# Altium PCB Main.PcbDoc (part 1 of 4)
Units mm, origin at the board's own origin, x right, y up, seen from the top; angles counter-clockwise.
Board outline 180 x 80 mm, 4 copper layers (L1_TOP, L2_GND, L3_PWR, L4_BOT), stack 1.447 mm thick; 236 components, 173 nets, 792 pads, 473 vias.
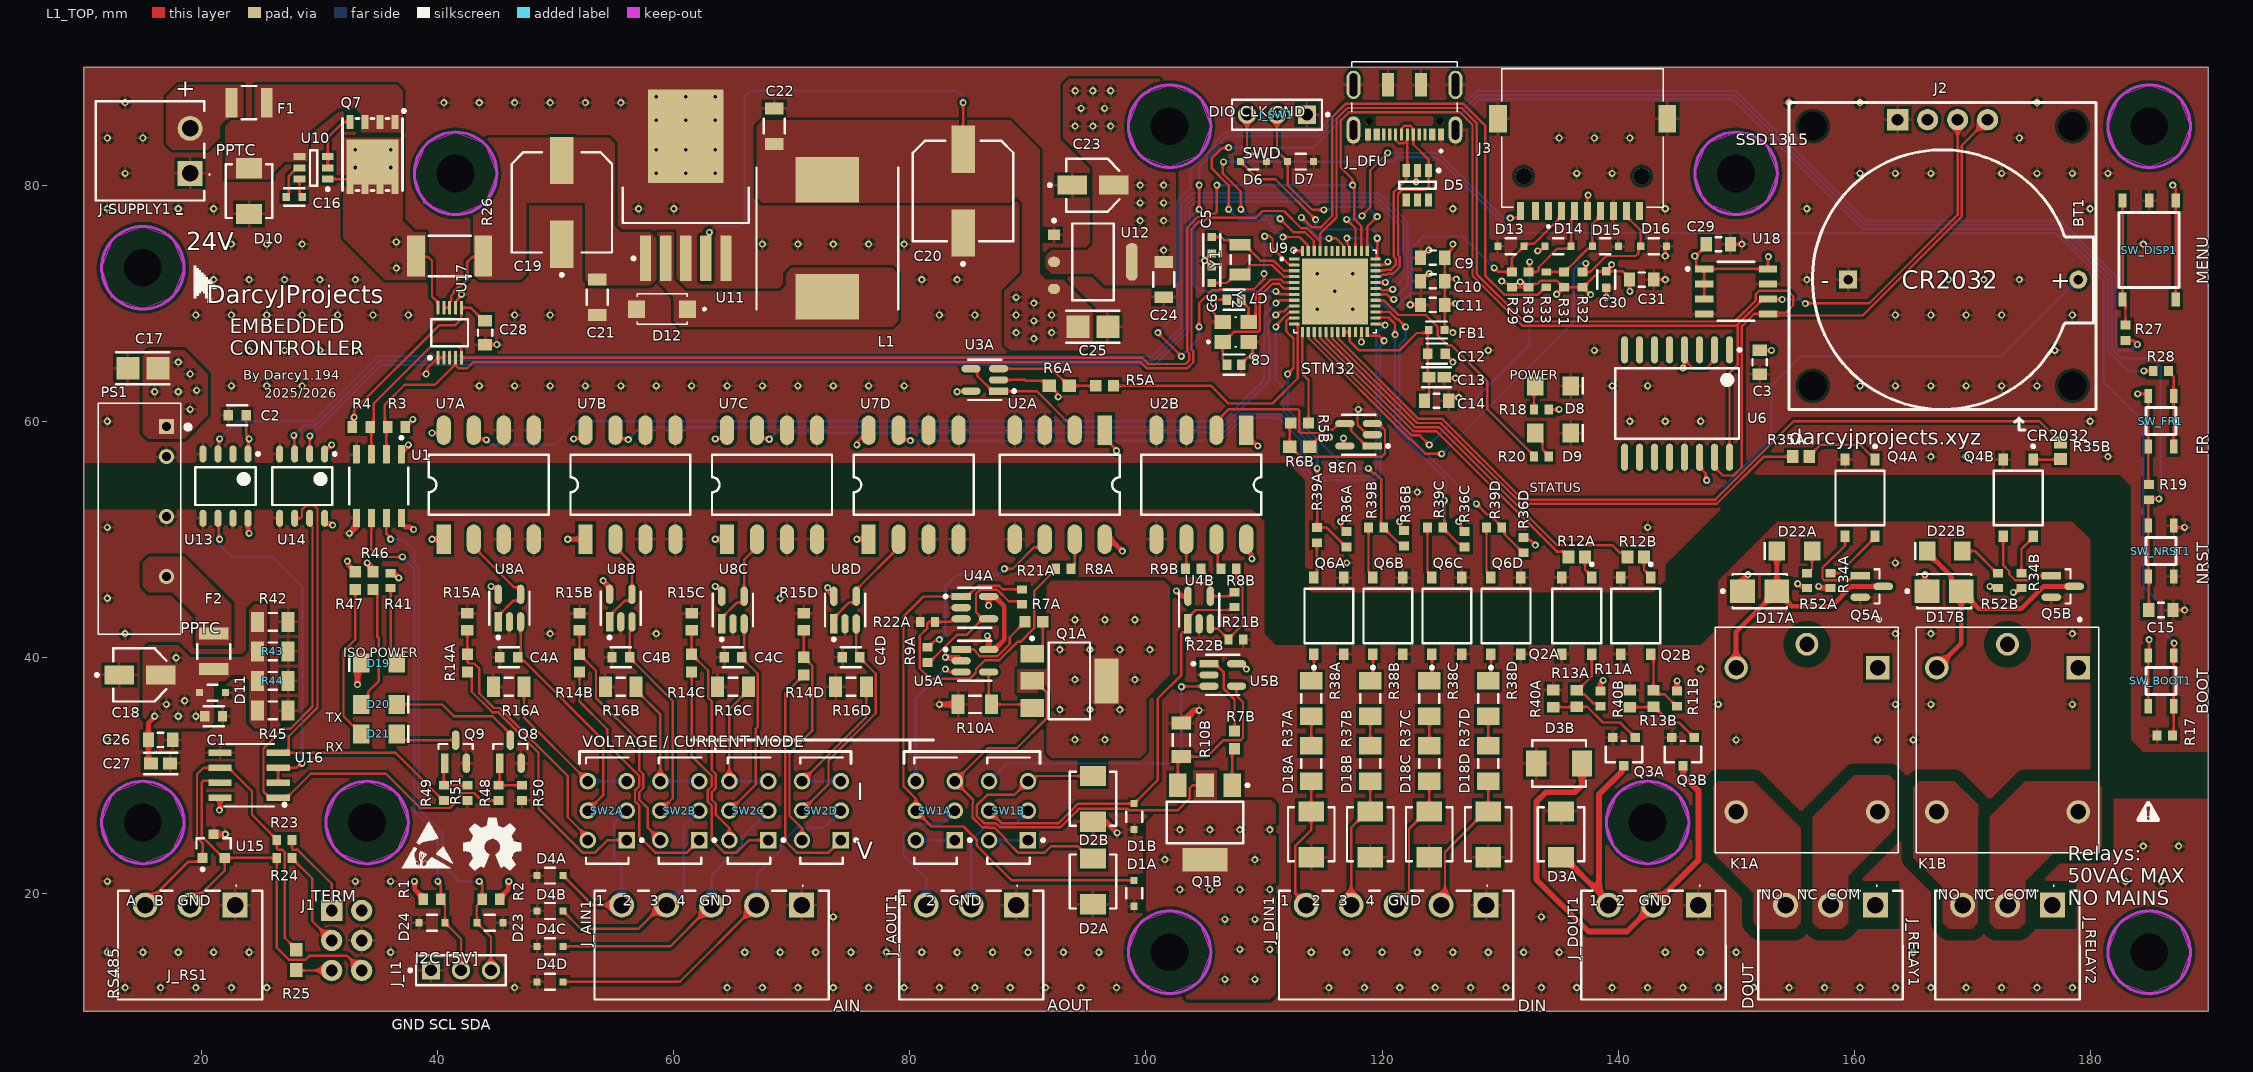
[diagram p0: L1_TOP view]
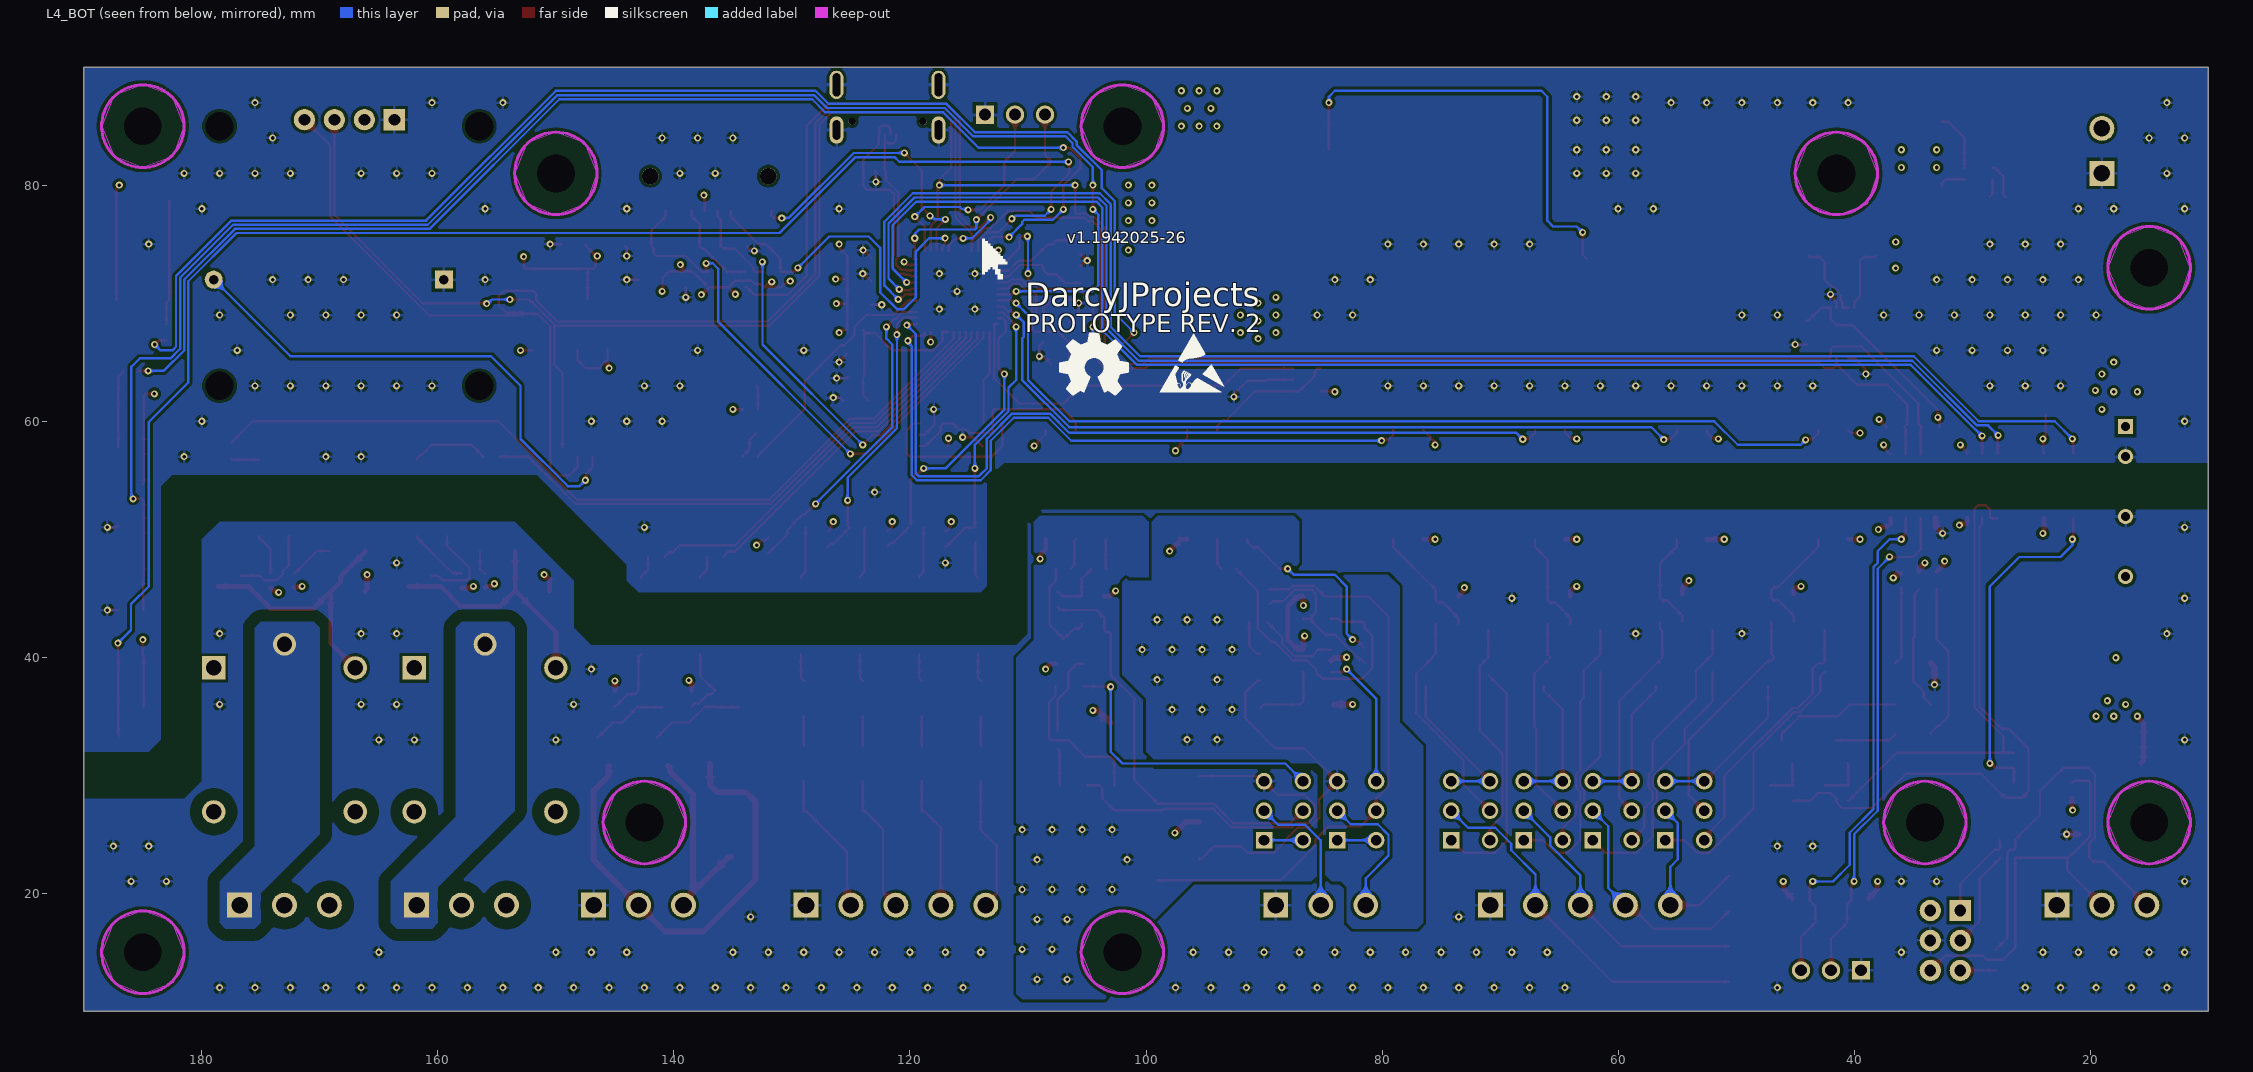
[diagram p1: L4_BOT view, seen from below]
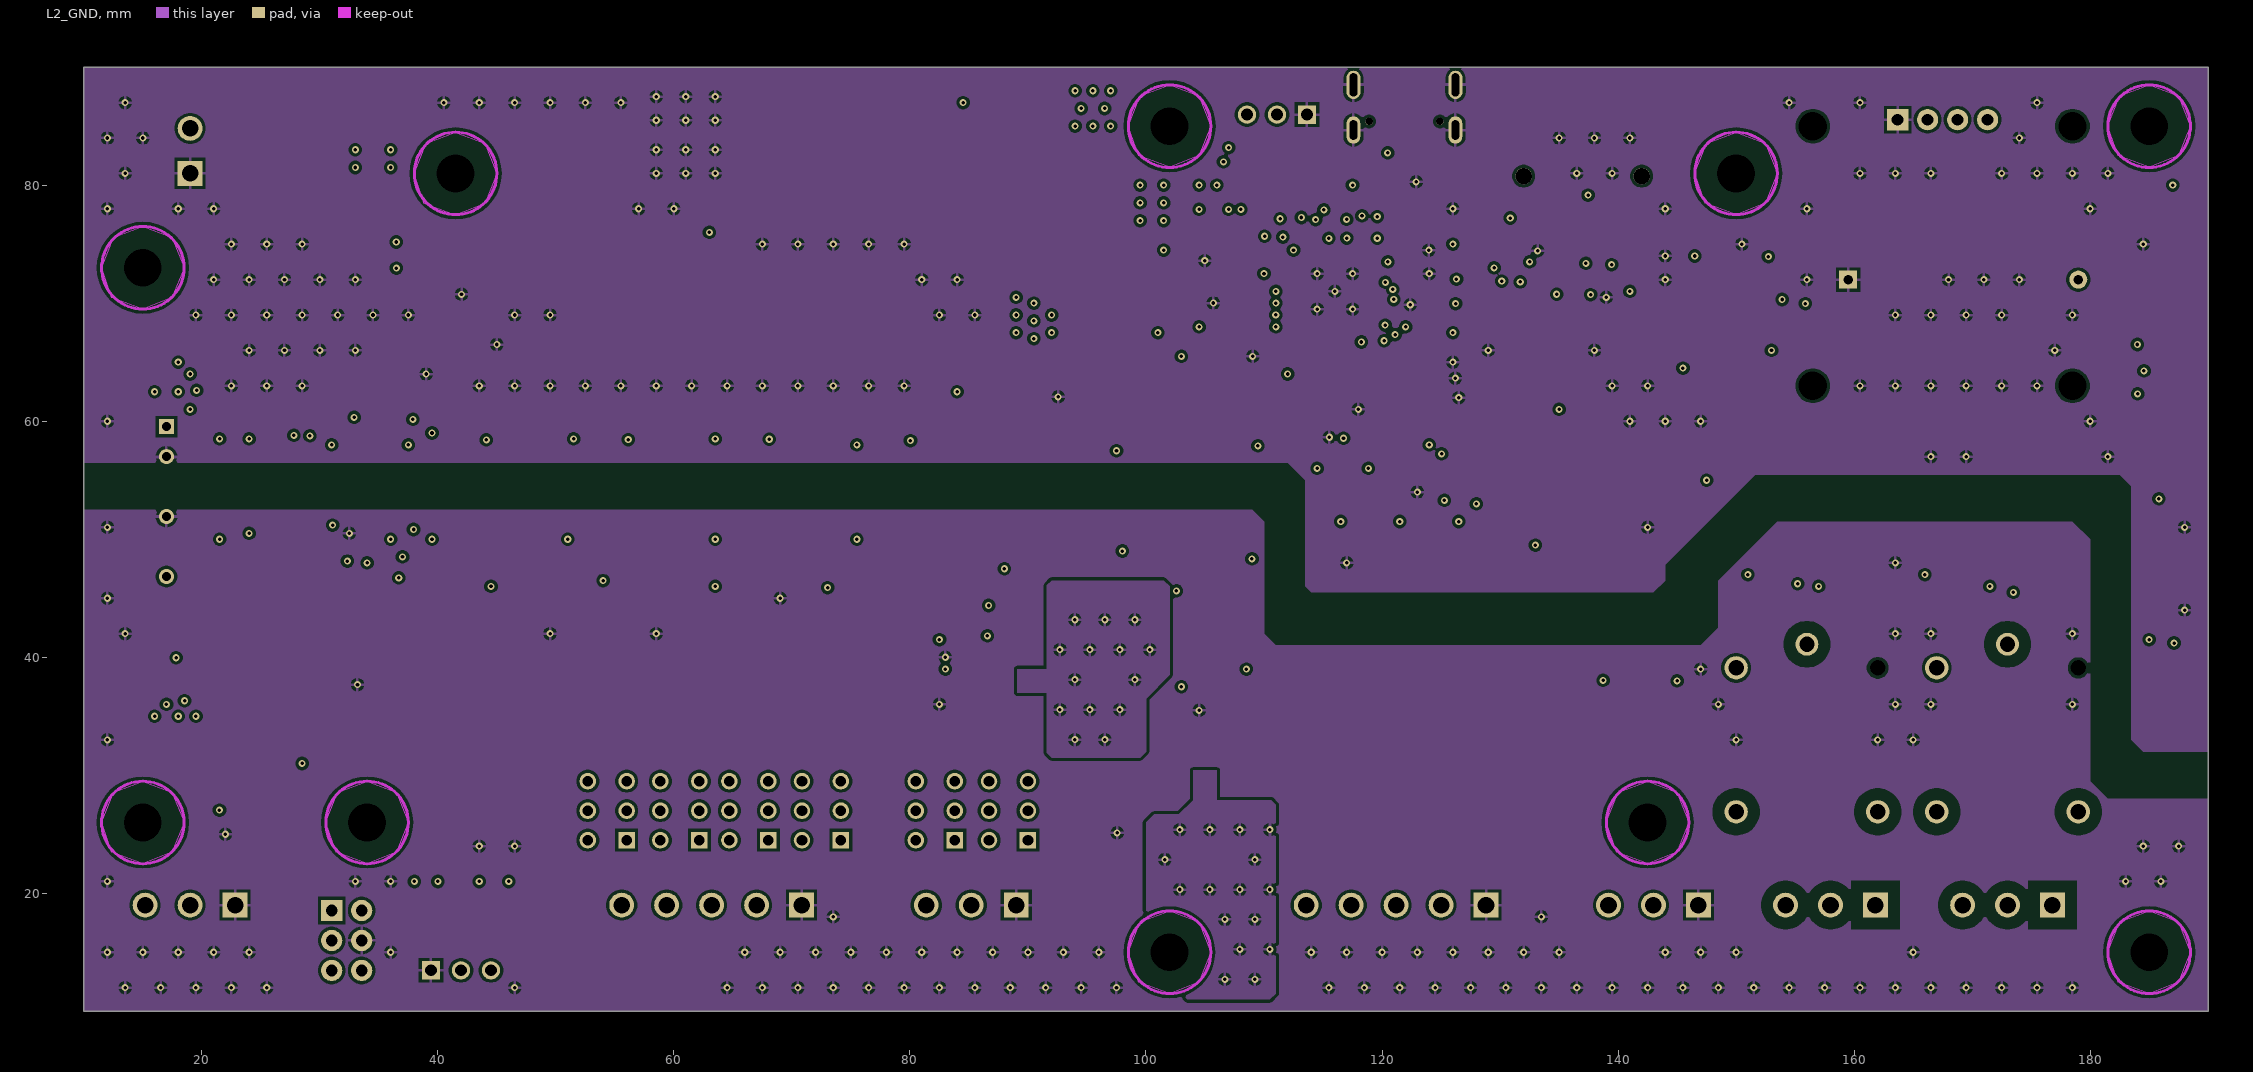
[diagram p2: L2_GND]
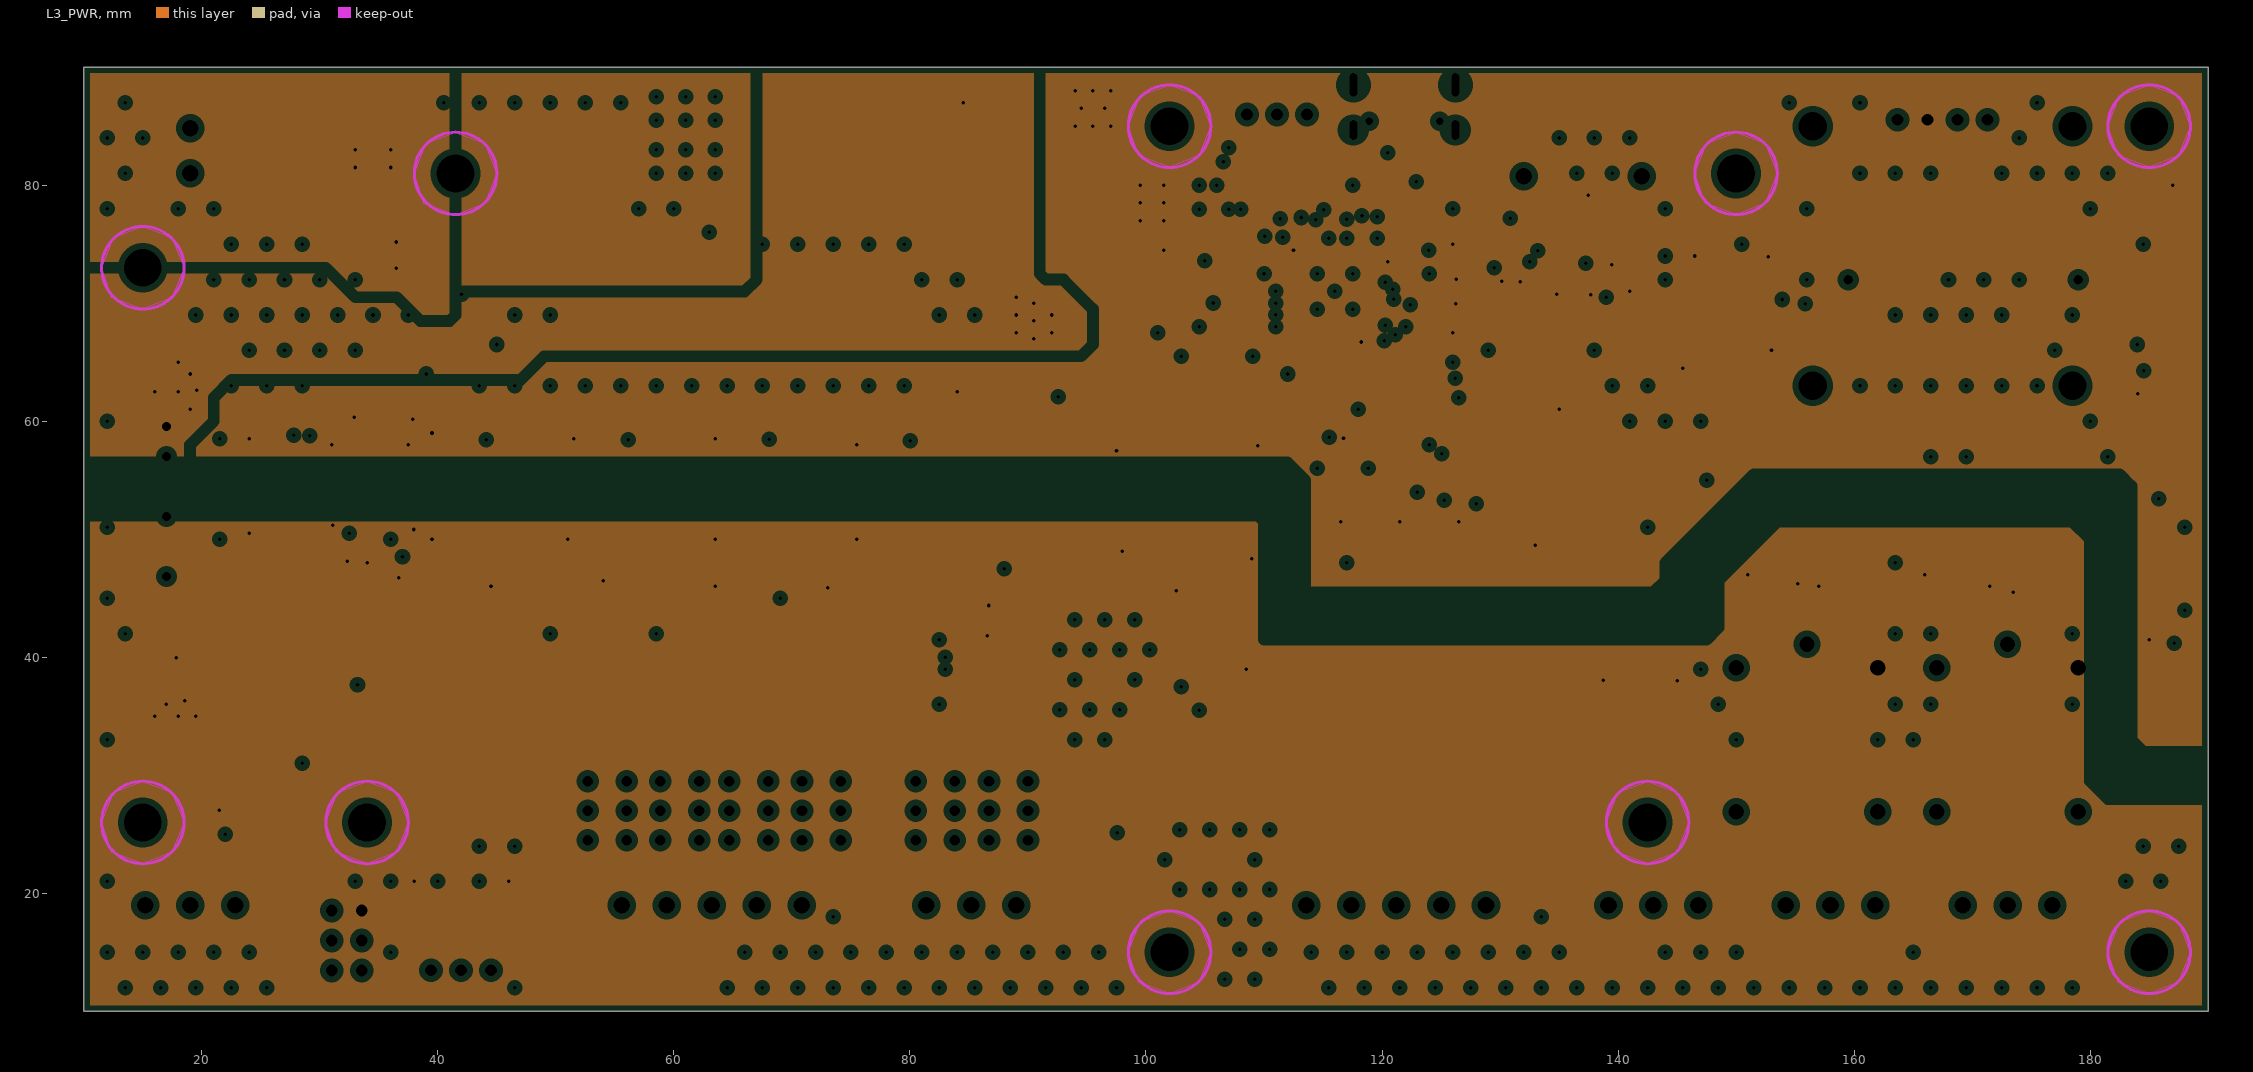
[diagram p3: L3_PWR, clearances drawn from the general rule]
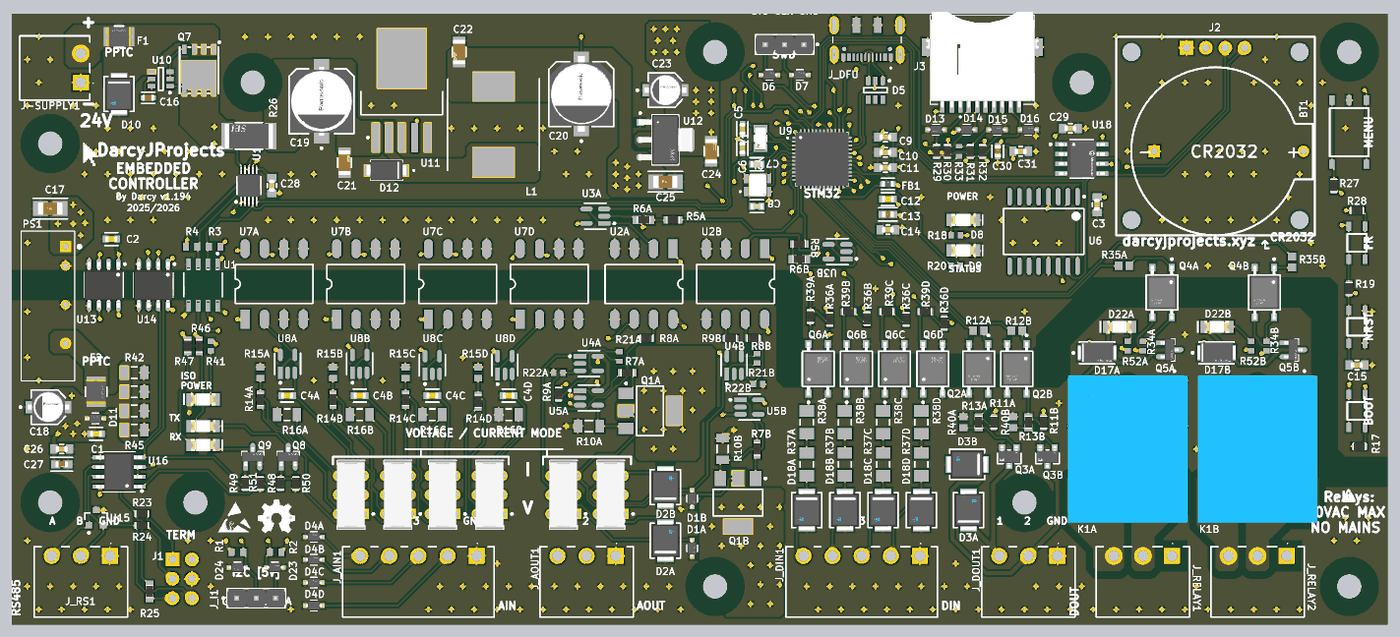
[diagram p6: 3D render of the assembled board from above, using the file's embedded part models]

## Layer stack, top to bottom
Top Solder: solder mask 0.0102, Solder Resist, Dk 3.5
L1_TOP: signal copper 0.035
Dielectric 1: prepreg 0.0711, 7628*1, Dk 4.1
L2_GND: signal copper 0.0152
Dielectric 2: core 1.065, FR-4, Dk 4.1
L3_PWR: plane copper 0.0152, net (Multiple Nets)
Dielectric 3: prepreg 0.2104, 7628*1, Dk 4.1
L4_BOT: signal copper 0.035
Bottom Solder: solder mask 0.0102, Solder Resist, Dk 3.5

## Board outline
10,10 10,90 190,90 190,10

## Design rules (kind name [scope] priority, off if disabled: settings)
Clearance Clearance_Teardrops [IsTeardrop] p1: gap=0.1 ignorepadtopadclearanceinfootprint=FALSE
Clearance Clearance_RelaysEachother [InNetClass('RELAY') vs InNetClass('RELAY')] p2: gap=1 ignorepadtopadclearanceinfootprint=FALSE
Clearance Clearance_RelaysAny [InNetClass('RELAY')] p3: gap=1 ignorepadtopadclearanceinfootprint=FALSE
Clearance Clearance_IsolatedGNDs [InNet('GND') vs InNet('5V_ISO_GND')] p4: gap=1 ignorepadtopadclearanceinfootprint=FALSE
Clearance [All] p5: gap=0.254 ignorepadtopadclearanceinfootprint=FALSE except(0.15: Arc-Arc Arc-Track Arc-SMDPad Track-Track Track-SMDPad SMDPad-SMDPad)
PlaneClearance [All] p1: clearance=0.508
PlaneConnect [All] p1: planeconnectstyle=Relief reliefexpansion=0.508 reliefentries=4 reliefconductorwidth=0.254 reliefairgap=0.254
PolygonConnect PolygonConnect_24V_Power_Direct [InNet('24V')] p1: thpad.connectstyle=Direct thpad.reliefconductorwidth=0.254 thpad.reliefentries=4 thpad.polygonreliefangle="90 Angle" thpad.airgapwidth=0.254 smdpad.connectstyle=Direct smdpad.reliefconductorwidth=0.254 smdpad.reliefentries=4 smdpad.polygonreliefangle="90 Angle" smdpad.airgapwidth=0.254 via.connectstyle=Relief via.reliefconductorwidth=0.254 via.reliefentries=4 via.polygonreliefangle="90 Angle" via.airgapwidth=0.254
PolygonConnect PolygonConnect_24V_PREMEASURE_Power_Direct [InNet('24V_PREMEASURE')] p2: thpad.connectstyle=Direct thpad.reliefconductorwidth=0.254 thpad.reliefentries=4 thpad.polygonreliefangle="90 Angle" thpad.airgapwidth=0.254 smdpad.connectstyle=Direct smdpad.reliefconductorwidth=0.254 smdpad.reliefentries=4 smdpad.polygonreliefangle="90 Angle" smdpad.airgapwidth=0.254 via.connectstyle=Relief via.reliefconductorwidth=0.254 via.reliefentries=4 via.polygonreliefangle="90 Angle" via.airgapwidth=0.254
PolygonConnect PolygonConnect_NETD12_1_Power_Direct_1 [InNet('NetD12_1')] p3: thpad.connectstyle=Direct thpad.reliefconductorwidth=0.254 thpad.reliefentries=4 thpad.polygonreliefangle="90 Angle" thpad.airgapwidth=0.254 smdpad.connectstyle=Direct smdpad.reliefconductorwidth=0.254 smdpad.reliefentries=4 smdpad.polygonreliefangle="90 Angle" smdpad.airgapwidth=0.254 via.connectstyle=Relief via.reliefconductorwidth=0.254 via.reliefentries=4 via.polygonreliefangle="90 Angle" via.airgapwidth=0.254
PolygonConnect PolygonConnect_24V_NetD10_1_Power_Direct [InNet('NetD10_1')] p4: thpad.connectstyle=Direct thpad.reliefconductorwidth=0.254 thpad.reliefentries=4 thpad.polygonreliefangle="90 Angle" thpad.airgapwidth=0.254 smdpad.connectstyle=Direct smdpad.reliefconductorwidth=0.254 smdpad.reliefentries=4 smdpad.polygonreliefangle="90 Angle" smdpad.airgapwidth=0.254 via.connectstyle=Relief via.reliefconductorwidth=0.254 via.reliefentries=4 via.polygonreliefangle="90 Angle" via.airgapwidth=0.254
PolygonConnect PolygonConnect_Relay [InNetClass('RELAY')] p5: thpad.connectstyle=Direct thpad.reliefconductorwidth=0.254 thpad.reliefentries=4 thpad.polygonreliefangle="90 Angle" thpad.airgapwidth=0.254 smdpad.connectstyle=Relief smdpad.reliefconductorwidth=0.254 smdpad.reliefentries=4 smdpad.polygonreliefangle="90 Angle" smdpad.airgapwidth=0.254 via.connectstyle=Relief via.reliefconductorwidth=0.254 via.reliefentries=4 via.polygonreliefangle="90 Angle" via.airgapwidth=0.254
PolygonConnect [All] p6: connectstyle=Relief reliefconductorwidth=0.254 reliefentries=4 polygonreliefangle="90 Angle" airgapwidth=0.254
RoutingVias [All] p1: holewidth=0.3 width=0.6 viastyle="Through Hole" minholewidth=0.3 minwidth=0.6 maxholewidth=0.4 maxwidth=0.7
SolderMaskExpansion [All] p1: expansion=0.102 istentingtop=FALSE
SupplyNets "Schematic Supply Nets_10" [InNet('5V_ISO')] p1: voltage=0.000
SupplyNets "Schematic Supply Nets_9" [InNet('5V_ISO_GND')] p2: voltage=0.000
SupplyNets "Schematic Supply Nets_8" [InNet('24V')] p3: voltage=0.000
SupplyNets "Schematic Supply Nets_7" [InNet('5V')] p4: voltage=0.000
SupplyNets "Schematic Supply Nets_6" [InNet('GND')] p5: voltage=0.000
SupplyNets "Schematic Supply Nets_5" [InNet('3V3')] p6: voltage=0.000
SupplyNets "Schematic Supply Nets_3" [InNet('24V_PREMEASURE')] p7: voltage=0.000
SupplyNets "Schematic Supply Nets" [InNet('VREF+')] p8: voltage=0.000
Width Width_DOUT_SINKING [InNetClass('DOUT_SINKING')] p1: maxlimit=0.5 minlimit=0.5 preferedwidth=0.5
Width Width_RELAY_COIL [InNetClass('RELAY_COIL')] p2: maxlimit=0.4 minlimit=0.4 preferedwidth=0.4
Width [All] p3: maxlimit=0.2 minlimit=0.2 preferedwidth=0.2
28 further rules are at their usual default settings.

## Classes and differential pairs
net class RELAY: NetJ_RELAY1_1 NetJ_RELAY1_2 NetJ_RELAY1_3 NetJ_RELAY2_1 NetJ_RELAY2_2 NetJ_RELAY2_3
net class DOUT_SINKING: 5V_ISO_GND DOUT1_FIELD DOUT2_FIELD
net class RELAY_COIL: 5V_ISO 5V_ISO_GND NetD17A_2 NetD17B_2
channel class DOut_Isolator: U_DOUT1 U_DOUT2
channel class DIn_Isolator: U_DIN1 U_DIN2 U_DIN3 U_DIN4
component class U_SPI_SD: C30 C31 D13 D14 D15 D16 J3 R29 R30 R31 R32 R33
component class U_DOUT2: D3B Q2 Q2B Q3 Q3B R11 R11B R12 R12B R13B R40B
component class U_DOUT1: D3A Q2 Q2A Q3 Q3A R11 R11A R12 R12A R13A R40A
component class U_DIN4: D18D Q6 Q6D R36D R37D R38 R38D R39 R39D
component class U_DIN3: D18C Q6 Q6C R36C R37C R38 R38C R39 R39C
component class U_DIN2: D18B Q6 Q6B R36B R37B R38 R38B R39 R39B
component class U_DIN1: D18A Q6 Q6A R36A R37A R38 R38A R39 R39A
component class U_RELAY2: D17B D22B K1 K1B Q4 Q4B Q5 Q5B R34B R35B R52B
component class U_RELAY1: D17A D22A K1 K1A Q4 Q4A Q5 Q5A R34A R35A R52A
component class U_AOUT2: D1B D2B Q1 Q1B R5 R5B R6 R6B R7 R7B R8 R8B R9 R9B R10 R10B R21B R22B SW1 SW1B U2 U2B U3 U3B U4B U5 U5B
component class U_AOUT1: D1A D2A Q1 Q1A R5 R5A R6 R6A R7 R7A R8 R8A R9 R9A R10 R10A R21A R22A SW1 SW1A U2 U2A U3 U3A U4A U5 U5A
channel class DOut_Relay: U_RELAY1 U_RELAY2
channel class AOut_Isolator: U_AOUT1 U_AOUT2
channel class AIn_Isolator: U_AIN1 U_AIN2 U_AIN3 U_AIN4
component class U_STM32_MCU: C5 C6 C7 C8 C9 C10 C11 C12 C13 C14 C15 D5 D6 D7 D8 D9 FB1 J_DFU J_SW1 R17 R18 R19 R20 SW_BOOT1 SW_NRST1 U9 Y1 Y2
component class U_RS485: C26 C27 D20 D21 J1 Q8 Q9 R23 R24 R25 R46 R47 R48 R49 R50 R51 U13 U14 U15 U16
component class U_Power_Supply: C16 C17 C18 C19 C20 C21 C22 C23 C24 C25 D10 D11 D12 D19 F1 F2 L1 PS1 Q7 R41 R42 R43 R44 R45 U10 U11 U12
component class U_I2C_RTC_DS3231: BT1 C3 U6
component class U_I2C_PowerMonitor_INA226: C28 R26 U17
component class U_I2C_Isolator: C1 C2 D23 D24 J_I1 R1 R2 R3 R4 U1
component class U_I2C_EEPROM_AT24C32: C29 U18
component class U_I2C_Display: J2 R27 SW_DISP1
component class U_BTN2_FactoryReset: R28 SW_FR1
component class U_AIN4: C4D D4D R14D R15D R16D SW2 SW2D U7 U7D U8D
component class U_AIN3: C4C D4C R14C R15C R16C SW2 SW2C U7 U7C U8C
component class U_AIN2: C4B D4B R14B R15B R16B SW2 SW2B U7 U7B U8B
component class U_AIN1: C4A D4A R14A R15A R16A SW2 SW2A U7 U7A U8A
component class Main: J-SUPPLY1 J_AIN1 J_AOUT1 J_DIN1 J_DOUT1 J_RELAY1 J_RELAY2 J_RS1

## Components (designator, comment, footprint, x,y, rotation, side; value= is the part's Value field where it differs from the comment)
BT1 "CR2032_HOLDER_TH" CR2032_HOLDER_TH 169.246,72 r0 top
C1 "103" FP-CC0603-DA-MFG 21,35 r0 top value="100 nF"
C2 "103" FP-CC0603-DA-MFG 23,60.5 r180 top value="100 nF"
C3 "100nF" FP-CGA3E-0_3-0_1-IPC_A 152,65 r90 top
C4A "10nF" FP-CC0603-DA-MFG 46,40 r180 top value="10 nF" (schematic designator C4)
C4B "10nF" FP-CC0603-DA-MFG 55.5,40 r180 top value="10 nF" (schematic designator C4)
C4C "10nF" FP-CC0603-DA-MFG 65,40 r180 top value="10 nF" (schematic designator C4)
C4D "10nF" FP-CC0603-DA-MFG 75,40 r180 top value="10 nF" (schematic designator C4)
C5 "6pF" FP-CGA3E-0_3-0_1-MFG 105.582,74.913 r270 top
C6 "6pF" FP-CGA3E-0_3-0_1-MFG 105.582,72.413 r90 top
C7 "10pF" FP-C0603C-CF-MFG 107.473,70.296 r180 top value="10 pF"
C8 "10pF" FP-C0603C-CF-MFG 107.473,64.796 r180 top value="10 pF"
C9 "100nF" FP-CGA3E-0_3-0_1-IPC_A 124.293,73.857 r180 top
C10 "100nF" FP-CGA3E-0_3-0_1-IPC_A 124.293,71.857 r180 top
C11 "100nF" FP-CGA3E-0_3-0_1-IPC_A 124.293,69.857 r180 top
C12 "10nF" FP-CC0603-DA-MFG 124.623,65.73 r0 top value="10 nF"
C13 "1uF" FP-C1608-080-0_1-IPC_B 124.623,63.73 r0 top
C14 "100nF" FP-CGA3E-0_3-0_1-IPC_A 124.623,61.73 r0 top
C15 "100nF" FP-CGA3E-0_3-0_1-IPC_A 186,44 r180 top
C16 "2.2uF" FP-GRM188-0_1-e0_2_0_5-MFG 27.825,79 r0 top
C17 "10uF" FP-C3216-160-0_2-IPC_A 15,64.5 r180 top
C18 "10uF" FP-FKB-MFG 14.75,38.5 r0 top
C19 "100uF" FP-FKF-MFG 50.5,78.55 r90 top
C20 "220uF" FP-FPF-MFG 84.5,79.5 r90 top
C21 "100nF" FP-1206-L_3_2_0_2-W_1_6_0-MFG 53.5,70.5 r90 top
C22 "100nF" FP-1206-L_3_2_0_2-W_1_6_0-MFG 68.5,85 r270 top
C23 "10uF" FP-FKB-MFG 95.5,80 r0 top
C24 "100nF" FP-1206-L_3_2_0_2-W_1_6_0-MFG 101.5,72 r90 top
C25 "10uF" FP-C3216-160-0_2-IPC_A 95.5,68 r0 top
C26 "100nF" FP-CGA3E-0_3-0_1-IPC_A 16.5,33 r180 top
C27 "10uF" FP-GRM188-0_1-e0_2_0_55-IPC_A 16.5,31 r0 top
C28 "100nF" FP-CGA3E-0_3-0_1-IPC_A 44,67.5 r90 top
C29 "100nF" FP-CGA3E-0_3-0_1-IPC_A 148.5,75 r180 top
C30 "10uF" FP-C1608-080-0_1-MFG 139,72 r90 top
C31 "100nF" FP-CGA3E-0_3-0_1-IPC_A 142,72 r0 top
D1A "PESD5V0S1BA,115" FP-SOD323-CA-MFG 99,20 r270 top (schematic designator D1)
D1B "PESD5V0S1BA,115" FP-SOD323-CA-MFG 99,26.5 r270 top (schematic designator D1)
D2A "SMBJ30CA" FP-SMBJ30CAHE3-52-MFG 95.5,21 r90 top (schematic designator D2)
D2B "SMBJ30CA" FP-SMBJ30CAHE3-52-MFG 95.5,28 r90 top (schematic designator D2)
D3A "SMBJ30CA" FP-SMBJ30CAHE3-52-MFG 135.165,25 r90 top (schematic designator D3)
D3B "SMBJ30CA" FP-SMBJ30CAHE3-52-MFG 135,31 r180 top (schematic designator D3)
D4A "PESD5V0S1BA,115" FP-SOD323-CA-MFG 49.5,21.5 r0 top (schematic designator D4)
D4B "PESD5V0S1BA,115" FP-SOD323-CA-MFG 49.5,18.5 r0 top (schematic designator D4)
D4C "PESD5V0S1BA,115" FP-SOD323-CA-MFG 49.5,15.5 r0 top (schematic designator D4)
D4D "PESD5V0S1BA,115" FP-SOD323-CA-MFG 49.5,12.5 r0 top (schematic designator D4)
D5 "SRV05-4.TCT" SMTC-SOT23-6_V 123,80 r270 top
D6 "PESD5V0S1BA,115" FP-SOD323-CA-MFG 109.1,82 r0 top
D7 "PESD5V0S1BA,115" FP-SOD323-CA-MFG 113.1,82 r0 top
D8 "Green 1206" WL-SMCW_1206_150120xx75000 134.5,63 r180 top
D9 "Red 1206" WL-SMCW_1206_150120xx75000 134.5,59 r180 top
D10 "SMBJ30CA" FP-SMBJ30CAHE3-52-MFG 24,79.5 r270 top
D11 "PESD5V0S1BA,115" FP-SOD323-CA-MFG 20.9,37 r0 top
D12 "SS36ALH" SODFL5226X100N 59,69.5 r180 top
D13 "PESD5V0S1BA,115" FP-SOD323-CA-MFG 130.92,74.825 r180 top
D14 "PESD5V0S1BA,115" FP-SOD323-CA-MFG 134.92,74.825 r180 top
D15 "PESD5V0S1BA,115" FP-SOD323-CA-MFG 138.92,74.825 r0 top
D16 "PESD5V0S1BA,115" FP-SOD323-CA-MFG 143.02,74.825 r0 top
D17A "1N4007" FP-1N4007_SMD-IPC_C 152,45.6 r0 top (schematic designator D17)
D17B "1N4007" FP-1N4007_SMD-IPC_C 167.632,45.6 r0 top (schematic designator D17)
D18A "SMBJ30CA" FP-SMBJ30CAHE3-52-MFG 114,25 r270 top (schematic designator D18)
D18B "SMBJ30CA" FP-SMBJ30CAHE3-52-MFG 119,25 r270 top (schematic designator D18)
D18C "SMBJ30CA" FP-SMBJ30CAHE3-52-MFG 124,25 r270 top (schematic designator D18)
D18D "SMBJ30CA" FP-SMBJ30CAHE3-52-MFG 129,25 r270 top (schematic designator D18)
D19 "Green 1206" WL-SMCW_1206_150120xx75000 35,39.5 r0 top
D20 "Blue 1206" WL-SMCW_1206_150120xx75000 35,36 r180 top
D21 "Blue 1206" WL-SMCW_1206_150120xx75000 35,33.5 r180 top
D22A "Yellow 1206" WL-SMCW_1206_150120xx75000 154.938,49 r0 top (schematic designator D22)
D22B "Yellow 1206" WL-SMCW_1206_150120xx75000 167.682,49 r0 top (schematic designator D22)
D23 "PESD5V0S1BA,115" FP-SOD323-CA-MFG 44.4,17.5 r0 top
D24 "PESD5V0S1BA,115" FP-SOD323-CA-MFG 39.5,17.5 r180 top
F1 "30V 2A" FP-MF-USMF-MFG 24,87 r0 top value=0.4-5Ω
F2 "6V 0.75A" FP-MF-USMF-MFG 21,40.5 r270 top value=0.4-5Ω
FB1 "1K 100MHz 0603" FP-BLM18-0_15-t0_8-MFG 124.623,67.73 r180 top
J1 "Jumper_2x6_2.54" Jumper_2x6_2.54 29.73,19.81 r270 top
J2 "OLED_096_SSD1315" OLED_096_SSD1315 167.5,74 r0 top
J3 "MSD-11-A" CUI_MSD-11-A 137,84 r180 top
J-SUPPLY1 "15EDGRC-3.81-02P" 15EDGRC-3.81-02P 19,81 r90 top
J_AIN1 "5Pin" 15EDGRC-3.81-05P 70.81,19 r180 top
J_AOUT1 "3Pin" 15EDGRC-3.81-03P 89,19 r180 top
J_DFU "USBC" JAE_DX07S016JA1R1500 121.9,85.4 r180 top
J_DIN1 "5Pin" 15EDGRC-3.81-05P 128.81,19 r180 top
J_DOUT1 "3Pin" 15EDGRC-3.81-03P 146.81,19 r180 top
J_I1 "90120-0123" FP-90120-0123-MFG 41.953,13.47 r0 top
J_RELAY1 "3Pin" 15EDGRC-3.81-03P 161.81,19 r180 top
J_RELAY2 "3Pin" 15EDGRC-3.81-03P 176.81,19 r180 top
J_RS1 "3Pin" 15EDGRC-3.81-03P 22.81,19 r180 top
J_SW1 "90120-0123" FP-90120-0123-MFG 111.1,85.979 r180 top
K1A "SRD-05VDC-SL-C" RELAY_SRD-05VDC-SL-C 156,33 r270 top (schematic designator K1)
K1B "SRD-05VDC-SL-C" RELAY_SRD-05VDC-SL-C 173,33 r270 top (schematic designator K1)
L1 "47uH" INDPM120120X800N 73,75.5 r90 top
PS1 "B0505S-2W" B0505S-2W 11.2,61.54 r270 top
Q1A "BCP56" ONSC-SOT-223-4-318E-04_V 93.5,38 r0 top (schematic designator Q1)
Q1B "BCP56" ONSC-SOT-223-4-318E-04_V 105,26 r270 top (schematic designator Q1)
Q2A "LTV-356T-D" FP-LTV-356T-D-MFG 136.5,43.5 r270 top (schematic designator Q2)
Q2B "LTV-356T-D" FP-LTV-356T-D-MFG 141.5,43.5 r270 top (schematic designator Q2)
Q3A "AO3400A" FP-SOT23-MFG 140.5,32 r270 top (schematic designator Q3)
Q3B "AO3400A" FP-SOT23-MFG 145.5,32 r270 top (schematic designator Q3)
Q4A "LTV-356T-D" FP-LTV-356T-D-MFG 160.5,53.5 r270 top (schematic designator Q4)
Q4B "LTV-356T-D" FP-LTV-356T-D-MFG 173.9,53.5 r270 top (schematic designator Q4)
Q5A "MMBT2222A-7-F" FP-SOT23-IPC_A 161.5,46 r0 top (schematic designator Q5)
Q5B "MMBT2222A-7-F" FP-SOT23-IPC_A 177.682,46 r0 top (schematic designator Q5)
Q6A "LTV-356T-D" FP-LTV-356T-D-MFG 115.5,43.5 r90 top (schematic designator Q6)
Q6B "LTV-356T-D" FP-LTV-356T-D-MFG 120.5,43.5 r90 top (schematic designator Q6)
Q6C "LTV-356T-D" FP-LTV-356T-D-MFG 125.5,43.5 r90 top (schematic designator Q6)
Q6D "LTV-356T-D" FP-LTV-356T-D-MFG 130.5,43.5 r90 top (schematic designator Q6)
Q7 "AGM403A1-M1" DFN8_5X6MM 37.134,86.285 r180 top
Q8 "MMBT2222A-7-F" FP-SOT23-IPC_A 46.14,32 r90 top
Q9 "MMBT2222A-7-F" FP-SOT23-IPC_A 41.5,32 r90 top
R1 "4.7K" RESC1608X55X25ML10T15 39.5,19.5 r180 top
R2 "4.7K" RESC1608X55X25ML10T15 44.5,19.5 r0 top
R3 "4.7K" RESC1608X55X25ML10T15 36.5,59.5 r0 top
R4 "4.7K" RESC1608X55X25ML10T15 33.5,59.5 r180 top
R5A "47K" RESC1608X55X30NL15T15 96.5,63 r180 top (schematic designator R5)
R5B "47K" RESC1608X55X30NL15T15 113.017,59.853 r180 top (schematic designator R5)
R6A "3.3K" RESC1609X55X30ML15T15 92.65,63 r180 top (schematic designator R6)
R6B "3.3K" RESC1609X55X30ML15T15 113.017,57.853 r0 top (schematic designator R6)
R7A "470R" RESC1608X55X30NL15T15 90.5,43 r0 top (schematic designator R7)
R7B "470R" RESC1608X55X30NL15T15 107.5,33 r270 top (schematic designator R7)
R8A "10K" RESC1609X55X30LL15T15 93,47.5 r180 top (schematic designator R8)
R8B "10K" RESC1609X55X30LL15T15 107,47.5 r0 top (schematic designator R8)
R9A "10K" RESC1609X55X30LL15T15 81.5,40.2 r270 top (schematic designator R9)
R9B "10K" RESC1609X55X30LL15T15 104,47.5 r0 top (schematic designator R9)
R10A "100R" RESC3216X70X50NL05T20 85.5,36 r0 top (schematic designator R10)
R10B "100R" RESC3216X70X50NL05T20 103,33 r270 top (schematic designator R10)
R11A "10K" RESC1609X55X30LL15T15 138.5,36.5 r270 top (schematic designator R11)
R11B "10K" RESC1609X55X30LL15T15 145,36.5 r270 top (schematic designator R11)
R12A "150R" RESC1608X55X30ML20T20 136.5,48.5 r0 top (schematic designator R12)
R12B "150R" RESC1608X55X30ML20T20 141.5,48.5 r0 top (schematic designator R12)
R13A "100R" RESC1609X50X30ML8T20 136.5,36.5 r270 top (schematic designator R13)
R13B "100R" RESC1609X50X30ML8T20 143,36.5 r270 top (schematic designator R13)
R14A "47K" RESC1608X55X30NL15T15 42.5,39.5 r90 top (schematic designator R14)
R14B "47K" RESC1608X55X30NL15T15 52,39.5 r90 top (schematic designator R14)
R14C "47K" RESC1608X55X30NL15T15 61.5,39.5 r90 top (schematic designator R14)
R14D "47K" RESC1608X55X30NL15T15 71,39.25 r90 top (schematic designator R14)
R15A "2K" RESC1608X55X30ML15T15 42.5,43 r270 top (schematic designator R15)
R15B "2K" RESC1608X55X30ML15T15 52,43 r270 top (schematic designator R15)
R15C "2K" RESC1608X55X30ML15T15 61.5,43 r270 top (schematic designator R15)
R15D "2K" RESC1608X55X30ML15T15 71,43 r270 top (schematic designator R15)
R16A "10R" RESC3216X70X50LL20T25 46,37.5 r180 top (schematic designator R16)
R16B "10R" RESC3216X70X50LL20T25 55.5,37.5 r180 top (schematic designator R16)
R16C "10R" RESC3216X70X50LL20T25 65,37.5 r180 top (schematic designator R16)
R16D "10R" RESC3216X70X50LL20T25 75,37.5 r180 top (schematic designator R16)
R17 "10K" RESC1609X55X30LL15T15 186.327,33.35 r0 top
R18 "5.1K" RESC1608X55X30LL15T15#1 133.5,61 r180 top
R19 "10K" RESC1609X55X30LL15T15 185,54 r270 top
R20 "5.1K" RESC1608X55X30LL15T15#1 133.5,57 r0 top
R21A "30K" RESC1608X55X30LL15T15#1 89.5,45.125 r270 top (schematic designator R21)
R21B "30K" RESC1608X55X30LL15T15#1 107.5,44.875 r90 top (schematic designator R21)
R22A "30K" RESC1608X55X30LL15T15#1 81.5,43 r180 top (schematic designator R22)
R22B "30K" RESC1608X55X30LL15T15#1 107.625,41.5 r0 top (schematic designator R22)
R23 "10K" RESC1609X55X30LL15T15 27,24.5 r180 top
R24 "10K" RESC1609X55X30LL15T15 27,23 r180 top
R25 "120R" RESC1609X55X30ML15T15 28,14.35 r270 top
R26 "0.1R" FP-RMCF2512-IPC_B 41,74 r180 top
R27 "330R" RESC1608X55X30LL15T15#2 183,67.5 r270 top
R28 "330R" RESC1608X55X30LL15T15#2 186,64.236 r180 top
R29 "10K" RESC1609X55X30LL15T15 131,72 r90 top
R30 "10K" RESC1609X55X30LL15T15 132.42,72 r90 top
R31 "10K" RESC1609X55X30LL15T15 135.43,72 r90 top
R32 "10K" RESC1609X55X30LL15T15 137,72 r90 top
R33 "33R" RESC1608X55X25LL10T15 133.93,72 r90 top
R34A "2.2K" RESC1608X55X30LL15T15#1 158,46.5 r90 top (schematic designator R34)
R34B "2.2K" RESC1608X55X30LL15T15#1 174.182,46.5 r90 top (schematic designator R34)
R35A "150R" RESC1608X55X30ML20T20 155.5,57 r0 top (schematic designator R35)
R35B "150R" RESC1608X55X30ML20T20 177.5,57.5 r270 top (schematic designator R35)
R36A "10K" RESC1609X55X30LL15T15 117,50 r270 top (schematic designator R36)
R36B "10K" RESC1609X55X30LL15T15 121.873,50.077 r270 top (schematic designator R36)
R36C "10K" RESC1609X55X30LL15T15 127,50 r270 top (schematic designator R36)
R36D "10K" RESC1609X55X30LL15T15 132,49.5 r270 top (schematic designator R36)
R37A "1K" RESC3216X70X50ML20T25 114,31 r90 top (schematic designator R37)
R37B "1K" RESC3216X70X50ML20T25 119,31 r90 top (schematic designator R37)
R37C "1K" RESC3216X70X50ML20T25 124,31 r90 top (schematic designator R37)
R37D "1K" RESC3216X70X50ML20T25 129,31 r90 top (schematic designator R37)
R38A "1K" RESC3216X70X50ML20T25 114,36.5 r90 top (schematic designator R38)
R38B "1K" RESC3216X70X50ML20T25 119,36.5 r90 top (schematic designator R38)
R38C "1K" RESC3216X70X50ML20T25 124,36.5 r90 top (schematic designator R38)
R38D "1K" RESC3216X70X50ML20T25 129,36.5 r90 top (schematic designator R38)
R39A "220R" RESC1608X55X30LL15T15#2 114.479,50.35 r90 top (schematic designator R39)
R39B "220R" RESC1608X55X30LL15T15#2 119.5,51 r0 top (schematic designator R39)
R39C "220R" RESC1608X55X30LL15T15#2 124.5,51 r0 top (schematic designator R39)
R39D "220R" RESC1608X55X30LL15T15#2 129.5,51 r0 top (schematic designator R39)
R40A "100K" RESC1608X55X30ML15T15 134.5,36.5 r90 top (schematic designator R40)
R40B "100K" RESC1608X55X30ML15T15 141,36.5 r90 top (schematic designator R40)
R41 "6.8K" RESC1608X55X30LL15T15#1 36,46.5 r270 top
R42 "510R" RESC3216X70X50LL20T25 26,43 r0 top
R43 "510R" RESC3216X70X50LL20T25 26,40.5 r0 top
R44 "510R" RESC3216X70X50LL20T25 26,38 r0 top
R45 "510R" RESC3216X70X50LL20T25 26,35.5 r0 top
R46 "470R" RESC1608X55X30NL15T15 34.5,46.5 r270 top
R47 "470R" RESC1608X55X30NL15T15 33,46.5 r270 top
R48 "10K" RESC1609X55X30LL15T15 45.14,28.5 r270 top
R49 "10K" RESC1609X55X30LL15T15 40.5,28.5 r270 top
R50 "10K" RESC1609X55X30LL15T15 47.14,28.5 r90 top
R51 "10K" RESC1609X55X30LL15T15 42.5,28.5 r90 top
R52A "6.8K" RESC1608X55X30LL15T15#1 156,46.5 r270 top (schematic designator R52)
R52B "6.8K" RESC1608X55X30LL15T15#1 172.182,46.5 r270 top (schematic designator R52)
SW1A "JS202011CQN" "FP-JS202011CQN-MFG - duplicate" 82.15,27 r90 top (schematic designator SW1)
SW1B "JS202011CQN" "FP-JS202011CQN-MFG - duplicate" 88.35,27 r90 top (schematic designator SW1)
SW2A "JS202011CQN" "FP-JS202011CQN-MFG - duplicate" 54.35,27 r90 top (schematic designator SW2)
SW2B "JS202011CQN" "FP-JS202011CQN-MFG - duplicate" 60.5,27 r90 top (schematic designator SW2)
SW2C "JS202011CQN" "FP-JS202011CQN-MFG - duplicate" 66.35,27 r90 top (schematic designator SW2)
SW2D "JS202011CQN" "FP-JS202011CQN-MFG - duplicate" 72.5,27 r90 top (schematic designator SW2)
SW_BOOT1 "3x4x2.5_TACTILE_BUTTON" 3x4x2.5_TACTILE_BUTTON 186,38 r90 top
SW_DISP1 "6x6x3.1_TACTILE_BUTTON" 6x6x3.1_TACTILE_BUTTON 185,74.5 r270 top
SW_FR1 "3x4x2.5_TACTILE_BUTTON" 3x4x2.5_TACTILE_BUTTON 186,60 r90 top
SW_NRST1 "3x4x2.5_TACTILE_BUTTON" 3x4x2.5_TACTILE_BUTTON 186,49 r90 top
U1 "ISO1540DR" FP-D0008A-MFG 35,54.5 r270 top
U2A "NSI1200DDBR" NSI1200DDBR 96.5,59.24 r270 top (schematic designator U2)
U2B "NSI1200DDBR" NSI1200DDBR 108.5,59.24 r270 top (schematic designator U2)
U3A "MCP6001T-I/OT" FP-C04-091-OT-IPC_A 86.334,63.5 r180 top (schematic designator U3)
U3B "MCP6001T-I/OT" FP-C04-091-OT-IPC_A 118.017,58.853 r180 top (schematic designator U3)
U4A "MCP6001T-I/OT" FP-C04-091-OT-IPC_A 85.5,44.2 r0 top (schematic designator U4)
U4B "MCP6001T-I/OT" FP-C04-091-OT-IPC_A 104.5,44 r90 top (schematic designator U4)
U5A "MCP6001T-I/OT" FP-C04-091-OT-IPC_A 85.5,39.7 r0 top (schematic designator U5)
U5B "MCP6001T-I/OT" FP-C04-091-OT-IPC_A 106.5,38.5 r0 top (schematic designator U5)
U6 "DS3231M+TRL" W16MK+1_N 145,61.5 r270 top
U7A "NSI1200DDBR" NSI1200DDBR 40.5,50 r90 top (schematic designator U7)
U7B "NSI1200DDBR" NSI1200DDBR 52.5,50 r90 top (schematic designator U7)
U7C "NSI1200DDBR" NSI1200DDBR 64.5,50 r90 top (schematic designator U7)
U7D "NSI1200DDBR" NSI1200DDBR 76.5,50 r90 top (schematic designator U7)
U8A "MCP6001T-I/OT" FP-C04-091-OT-IPC_A 46.059,44.166 r90 top (schematic designator U8)
U8B "MCP6001T-I/OT" FP-C04-091-OT-IPC_A 55.5,44.166 r90 top (schematic designator U8)
U8C "MCP6001T-I/OT" FP-C04-091-OT-IPC_A 65,44 r90 top (schematic designator U8)
U8D "MCP6001T-I/OT" FP-C04-091-OT-IPC_A 74.5,44 r90 top (schematic designator U8)
U9 "STM32G431CBU6" QFN50P700X700X60-49N 116,71 r0 top
U10 "XL74610T" SOT95P245X110-6N 29.467,81.467 r180 top
U11 "LM2596S-5.0" KTT0005B_L 61,80 r90 top
U12 "AMS1117-3.3" FP-AMS1117-IPC_C 95.5,73.5 r0 top
U13 "CA-IS3722" CA-IS3722HS 22,54.5 r270 top
U14 "CA-IS3722" CA-IS3722HS 28.5,54.5 r270 top
U15 "PSM712-LF-T7" PRKT-SOT23-3_V 21,24 r90 top
U16 "MAX485CSA" 21-0041B_8 24,30 r180 top
U17 "INA226" DGS0010A_L 41,67.5 r90 top
U18 "AT24C32BN" FP-C04-057-SN-MFG 150,71 r0 top
Y1 "NX3215SA-32.768K-STD-MUS-2" FP-NX3215SA-MFG 107.975,73.695 r270 top
Y2 "8MHz" XTAL_C3E-8.000-10-1020-M 107.592,67.571 r0 top

## Footprints (in the part's own frame and the unit in brackets; to place one, negate y for a bottom-side part, rotate by r counter-clockwise, add the part's x,y. Pads: shape width x height; smd on the part's side, far side on the other; paste and mask are expansions set on the pad)
3x4x2.5_TACTILE_BUTTON [mm]
  rect 1.2x0.65 smd: 1(-2.15,1.075) 2(2.15,1.075) 3(-2.15,-1.075) 4(2.15,-1.075)
  silkscreen extent -1.14,-1.27 1.14,1.27
6x6x3.1_TACTILE_BUTTON [mm]
  rect 1.2x0.7 smd: 1(-4.2,2.25) 2(4.2,2.25) 3(-4.2,-2.25) 4(4.2,-2.25) 5(-4.2,0)
  silkscreen extent -3.18,-2.54 3.18,2.54
15EDGRC-3.81-02P [mm]
  rect 2.1x2.1 hole 1.4: 1(0,0)
  round 2.1 hole 1.4: 2(3.81,0)
  silkscreen extent -2.3,-1.7 6.11,8
15EDGRC-3.81-03P [mm]
  rect 2.1x2.1 hole 1.4: 1(0,0)
  round 2.1 hole 1.4: 2(3.81,0) 3(7.62,0)
  silkscreen extent -2.3,-1.7 9.92,8
15EDGRC-3.81-05P [mm]
  rect 2.1x2.1 hole 1.4: 1(0,0)
  round 2.1 hole 1.4: 2(3.81,0) 3(7.62,0) 4(11.43,0) 5(15.24,0)
  silkscreen extent -2.3,-1.7 17.54,8
21-0041B_8 [mil]
  rect 78x21 smd: 1(-97,75) 2(-97,25) 3(-97,-25) 4(-97,-75) 5(97,-75) 6(97,-25) 7(97,25) 8(97,75)
  silkscreen extent -84,-104 84,104, body extent -118,-96 118,96, height 69
B0505S-2W [mm] "4 Pin Version"
  rect 1.288x1.288 hole 0.78: 1(2,5.8)
  round 1.288 hole 0.78: 2(4.54,5.8) 5(9.62,5.8) 7(14.7,5.8)
  silkscreen extent 0,0 19.6,7.75
CA-IS3722HS [mm] "Dual Channel Standard Digital Isolators"
  oval 1.45x0.6 smd: 1(-2.725,1.905) 2(-2.725,0.635) 3(-2.725,-0.635) 4(-2.725,-1.905) 5(2.725,-1.905) 6(2.725,-0.635) 7(2.725,0.635) 8(2.725,1.905)
  silkscreen extent -2.85,-2.55 1.6,2.88, body extent -3,-2.55 3,2.55, height 1.8
CR2032_HOLDER_TH [mil]
  rect 60x60 hole 32: 1(-384,0)
  round 60 hole 32: 2(384,0)
  silkscreen extent -503,-433 434,433
CUI_MSD-11-A [mm]
  rect 0.6x1.5 smd: CD(5.25,6.18) P1(2.9,6.18) P2(1.8,6.18) P3(0.7,6.18) P4(-0.4,6.18) P5(-1.5,6.18) P6(-2.6,6.18) P7(-3.7,6.18) P8(-4.8,6.18) WP(4,6.18)
  rect 1.5x2.34 smd: G1(-7.17,-1.62) G2(7.17,-1.62)
  round 1.4 hole 1.4 unplated: ""(-5,3.23) ""(5,3.23)
  silkscreen extent -6.84,-5.85 6.84,7.6, body extent -7.39,-6.3 7.39,6.3, height 1.8
DFN8_5X6MM [mm]
  rect 0.58x1.2 smd: 1(0.764,0.922) 2(2.034,0.922) 3(3.304,0.922) 4(4.574,0.922) 5(4.574,6.422) 6(3.304,6.422) 7(2.034,6.422) 8(0.764,6.422)
  rect 4.4x3.8 smd: 9(2.667,4.318)
  silkscreen extent -0.1,-0.13 5.21,6.73
DGS0010A_L [mm] "SOP, 10-Leads, Body 3.1x3.1mm, Pitch 0.5mm, IPC High Density"
  rrect40% 1.15x0.25 smd: 1(-2.125,1) 2(-2.125,0.5) 3(-2.125,0) 4(-2.125,-0.5) 5(-2.125,-1) 6(2.125,-1) 7(2.125,-0.5) 8(2.125,0) 9(2.125,0.5) 10(2.125,1)
  silkscreen extent -2.25,-1.55 1.15,1.8, body extent -2.45,-1.5 2.45,1.5, height 0.94
FP-1N4007_SMD-IPC_C [mm]
  rect 2.1x2 smd paste+0 mask+0: 1(-1.45,0) 2(1.45,0)
  silkscreen extent -3.25,-1.45 2.3,1.45, body extent -2.6,-1.55 2.6,1.55, height 0.25
FP-1206-L_3_2_0_2-W_1_6_0-MFG [mm]
  rect 1x1.6 smd paste+0 mask+0: 1(-1.5,0) 2(1.5,0)
  silkscreen extent -0.63,-0.9 0.63,0.9, body extent -2.1,-1 2.1,1, height 0.25
FP-90120-0123-MFG [mm]
  rect 1.55x1.55 hole 1 paste-2539.97 mask+0: 1(-2.54,0)
  round 1.55 hole 1 paste-2539.97 mask+0: 2(0,0) 3(2.54,0)
  silkscreen extent -4.42,-1.27 3.81,1.27, body extent -3.91,-1.37 3.91,1.37, height 0.25
FP-AMS1117-IPC_C [mm]
  rect 1.004x0.872 smd paste+0 mask+0: 1(-3.295,2.29)
  rrect100% 1.004x0.872 smd paste+0 mask+0: 2(-3.295,0) 3(-3.295,-2.29)
  rrect87% 1.004x3.182 smd paste+0 mask+0: 4(3.295,0)
  silkscreen extent -3.42,-3.25 1.75,3.62, body extent -3.9,-3.35 3.9,3.35, height 0.25
FP-BLM18-0_15-t0_8-MFG [mm]
  rect 0.65x0.7 smd paste+0 mask+0: 1(-0.675,0) 2(0.675,0)
  silkscreen extent -0.87,-0.72 0.87,0.72, body extent -1.1,-0.58 1.1,0.58, height 0.25
FP-C04-057-SN-MFG [mm]
  rect 1.55x0.6 smd paste+0 mask+0: 1(-2.7,1.905) 2(-2.7,0.635) 3(-2.7,-0.635) 4(-2.7,-1.905) 5(2.7,-1.905) 6(2.7,-0.635) 7(2.7,0.635) 8(2.7,1.905)
  silkscreen extent -4.22,-2.5 1.55,2.5, body extent -3.57,-2.75 3.57,2.75, height 0.25
FP-C04-091-OT-IPC_A [mil]
  rect 64.5x24.33 smd paste+0 mask+0: 1(-45.91,37.4)
  rrect100% 64.5x24.33 smd paste+0 mask+0: 2(-45.91,0) 3(-45.91,-37.4) 4(45.91,-37.4) 5(45.91,37.4)
  silkscreen extent -103,-67 55,67
FP-C0603C-CF-MFG [mm]
  rect 0.75x0.9 smd paste+0 mask+0: 1(-0.6,0) 2(0.6,0)
  silkscreen extent -0.87,-0.85 0.88,0.85, body extent -1.2,-0.6 1.2,0.6, height 0.25
FP-C1608-080-0_1-IPC_B [mm]
  rect 1.131x0.912 smd paste+0 mask+0: 1(-0.641,0) 2(0.641,0)
  silkscreen extent -1.21,-0.86 1.21,0.86, body extent -1.46,-0.71 1.46,0.71, height 0.25
FP-C1608-080-0_1-MFG [mm]
  rect 0.7x0.7 smd paste+0 mask+0: 1(-0.7,0) 2(0.7,0)
  silkscreen extent -0.8,-0.75 0.8,0.75, body extent -1.15,-0.55 1.15,0.55, height 0.25
FP-C3216-160-0_2-IPC_A [mm]
  rect 1.954x1.906 smd paste+0 mask+0: 1(-1.276,0) 2(1.276,0)
  silkscreen extent -2.25,-1.35 2.25,1.35, body extent -2.75,-1.45 2.75,1.45, height 0.25
FP-CC0603-DA-MFG [mm]
  rect 0.8x0.9 smd paste+0 mask+0: 1(-0.75,0) 2(0.75,0)
  silkscreen extent -0.85,-0.85 0.85,0.85, body extent -1.35,-0.75 1.35,0.75, height 0.25
FP-CGA3E-0_3-0_1-IPC_A [mm]
  rect 0.956x1.206 smd paste+0 mask+0: 1(-1.025,0) 2(1.025,0)
  silkscreen extent -0.25,-0.6 0.25,0.6, body extent -2,-1.1 2,1.1, height 0.25
FP-CGA3E-0_3-0_1-MFG [mm]
  rect 0.7x0.7 smd paste+0 mask+0: 1(-0.7,0) 2(0.7,0)
  silkscreen extent -0.95,-0.72 0.95,0.72, body extent -1.15,-0.65 1.15,0.65, height 0.25
FP-D0008A-MFG [mm]
  rrect17% 1.55x0.6 smd paste+0 mask+0: 1(-2.7,1.905) 2(-2.7,0.635) 3(-2.7,-0.635) 4(-2.7,-1.905) 5(2.7,-1.905) 6(2.7,-0.635) 7(2.7,0.635) 8(2.7,1.905)
  silkscreen extent -4.22,-2.5 1.55,2.5, body extent -3.57,-2.75 3.57,2.75, height 0.25
FP-FKB-MFG [mm]
  rect 2.5x1.6 smd paste+0 mask+0: 1(-1.75,0) 2(1.75,0)
  silkscreen extent -3.77,-2.25 2.25,2.25, body extent -3.25,-2.5 3.25,2.5, height 0.25
FP-FKF-MFG [mm]
  rect 4x2 smd paste+0 mask+0: 1(-3.55,0) 2(3.55,0)
  silkscreen extent -6.27,-4.25 4.25,4.25, body extent -5.8,-4.5 5.8,4.5, height 0.25
FP-FPF-MFG [mm]
  rect 4x2 smd paste+0 mask+0: 1(-3.55,0) 2(3.55,0)
  silkscreen extent -6.3,-4.25 4.25,4.25, body extent -5.8,-4.5 5.8,4.5, height 0.25
FP-GRM188-0_1-e0_2_0_5-MFG [mm]
  rect 0.65x0.7 smd paste+0 mask+0: 1(-0.675,0) 2(0.675,0)
  silkscreen extent -0.85,-0.75 0.85,0.75, body extent -1.1,-0.55 1.1,0.55, height 0.25
FP-GRM188-0_1-e0_2_0_55-IPC_A [mm]
  rect 1.208x1.012 smd paste+0 mask+0: 1(-0.802,0) 2(0.802,0)
  silkscreen extent -1.41,-0.91 1.41,0.91, body extent -1.91,-1.01 1.91,1.01, height 0.25
"FP-JS202011CQN-MFG - duplicate" [mm]
  rect 1.4x1.4 hole 0.9 paste-2539.97 mask+0: 1(-2.5,-1.65)
  round 1.4 hole 0.9 paste-2539.97 mask+0: 2(0,-1.65) 3(2.5,-1.65) 4(-2.5,1.65) 5(0,1.65) 6(2.5,1.65)
  silkscreen extent -4.5,-3.05 4.5,1.8, body extent -4.6,-2.45 4.6,2.45, height 0.25
FP-LTV-356T-D-MFG [mm]
  rect 1x0.8 smd paste+0 mask+0: 1(-3.25,1.27) 2(-3.25,-1.27) 3(3.25,-1.27) 4(3.25,1.27)
  silkscreen extent -4.5,-2.07 2.3,2.07, body extent -3.85,-2.17 3.85,2.17, height 0.25
FP-MF-USMF-MFG [mm]
  rect 1x2.5 smd paste+0 mask+0: 1(-1.5,0) 2(1.5,0)
  silkscreen extent -0.63,-1.4 0.63,1.4, body extent -2.1,-1.5 2.1,1.5, height 0.25
FP-NX3215SA-MFG [mm]
  rect 1x1.8 smd paste+0 mask+0: 1(-1.25,0) 2(1.25,0)
  silkscreen extent -0.38,-0.8 0.38,0.8, body extent -1.85,-1 1.85,1, height 0.25
FP-RMCF2512-IPC_B [mm]
  rect 1.504x3.455 smd paste+0 mask+0: 1(-2.851,0) 2(2.851,0)
  silkscreen extent -1.8,-1.73 1.8,1.73, body extent -3.85,-1.98 3.85,1.98, height 0.25
FP-SMBJ30CAHE3-52-MFG [mm]
  rect 1.716x2.18 smd paste+0 mask+0: 1(-1.937,0) 2(1.937,0)
  silkscreen extent -2.28,-1.97 2.28,1.97, body extent -2.9,-2.07 2.89,2.07, height 0.25
FP-SOD323-CA-MFG [mm]
  rect 0.6x0.6 smd paste-1000 mask+0: 1(-1.1,0) 2(1.1,0)
  silkscreen extent -0.43,-0.67 0.43,0.67, body extent -1.53,-0.82 1.53,0.82, height 0.25
FP-SOT23-IPC_A [mm]
  rect 1.659x0.627 smd paste+0 mask+0: 1(-0.977,0.915)
  rrect100% 1.659x0.627 smd paste+0 mask+0: 2(-0.977,-0.915) 3(0.977,0)
  silkscreen extent 0.23,-1.45 0.65,1.45, body extent -2.31,-1.95 2.31,1.95, height 0.25
FP-SOT23-MFG [mm]
  rect 0.8x0.8 smd paste+0 mask+0: 1(-1.2,0.95) 2(-1.2,-0.95) 3(1.2,0)
  silkscreen extent -0.9,-1.55 0.9,1.55, body extent -1.7,-1.78 1.7,1.78, height 0.25
INDPM120120X800N [mm]
  rect 3.85x5.4 smd: 1(-4.95,0) 2(4.95,0)
  silkscreen extent -6,-6 6,6
JAE_DX07S016JA1R1500 [mm]
  rect 0.52x1 smd: 1(-3.1,1.1) 2(-2.35,1.1) 11(2.35,1.1) 12(3.1,1.1)
  rect 0.27x1 smd: 3(-1.75,1.1) 4(-1.25,1.1) 5(-0.75,1.1) 6(-0.25,1.1) 7(0.25,1.1) 8(0.75,1.1) 9(1.25,1.1) 10(1.75,1.1)
  rect 1x2 smd: S1(-1.4,-3.1) S2(1.4,-3.1)
  oval 1.158x2.316 hole 0.65 slot 1.65 at 90 deg: S3(-4.32,0.725) S4(4.32,0.725)
  oval 1.2x2.4 hole 0.65 slot 1.95 at 90 deg: S5(-4.32,-3.1) S6(4.32,-3.1)
  round 0.63 hole 0.63 unplated: ""(-3,0) ""(3,0)
  round 0.6 hole 0.6 unplated: ""(3,0)
  silkscreen extent -4.47,-5.05 4.47,2.6
Jumper_2x6_2.54 [mm]
  rect 1.8x1.8 hole 1: 1(1.27,1.27)
  round 1.8 hole 1: 2(1.27,3.81) 3(3.81,1.27) 4(3.81,3.81) 5(6.35,1.27) 6(6.35,3.81)
KTT0005B_L [mm] "DPAK, 5-Leads, Body 10.65x9.65mm, Pitch 1.7mm, IPC High Density"
  rrect11% 3.85x0.95 smd: 1(-6.2,3.4) 2(-6.2,1.7) 3(-6.2,0) 4(-6.2,-1.7) 5(-6.2,-3.4)
  rrect2% 7.9x6.4 smd: 6(4.15,0)
  silkscreen extent -6.32,-5.35 -0.2,5.35, body extent -3.2,-5.32 6.45,5.33, height 4.83
NSI1200DDBR [mm]
  rect 2.5x1.2 smd: 1(0,0)
  oval 2.5x1.2 smd: 2(0,-2.54) 3(0,-5.08) 4(0,-7.62) 5(9.24,-7.62) 6(9.24,-5.08) 7(9.24,-2.54) 8(9.24,0)
  silkscreen extent 2.08,-8.89 7.15,1.27
OLED_096_SSD1315 [mm]
  rect 1.8x1.8 hole 1: 1(-3.81,11.55)
  round 1.8 hole 1: 2(-1.27,11.55) 3(1.27,11.55) 4(3.81,11.55)
  rect 0x0 hole 2.4 unplated: 15(-11,-11) 15(-11,11) 15(11,-11) 15(11,11)
  silkscreen extent -13,-13 13,13
ONSC-SOT-223-4-318E-04_V [mm] "SOT223, 4-Leads, Body 6.5x3.5mm, Pitch 2.3mm"
  rect 2x1.5 smd: 1(-3.15,2.3) 2(-3.15,0) 3(-3.15,-2.3)
  rect 2x3.8 smd: 4(3.15,0)
  silkscreen extent -3.27,-3.25 1.75,3.72, body extent -1.75,-3.25 1.75,3.25, height 1.75
PRKT-SOT23-3_V [mm] "SOT23, 3-Leads, Body 2.92x1.3mm, Pitch 0.94mm"
  rect 0.84x0.84 smd: 1(-1,0.94) 3(1,0)
  rect 0.84x0.9 smd: 2(-1,-0.94)
  silkscreen extent -2.09,-1.46 0.65,1.46, body extent -0.65,-1.46 0.65,1.46, height 1.17
QFN50P700X700X60-49N [mm]
  rect 0.86x0.27 smd mask+0.05: 1(-3.435,2.75) 2(-3.435,2.25) 3(-3.435,1.75) 4(-3.435,1.25) 5(-3.435,0.75) 6(-3.435,0.25) 7(-3.435,-0.25) 8(-3.435,-0.75) 9(-3.435,-1.25) 10(-3.435,-1.75) 11(-3.435,-2.25) 12(-3.435,-2.75) 25(3.435,-2.75) 26(3.435,-2.25) 27(3.435,-1.75) 28(3.435,-1.25) 29(3.435,-0.75) 30(3.435,-0.25) 31(3.435,0.25) 32(3.435,0.75) 33(3.435,1.25) 34(3.435,1.75) 35(3.435,2.25) 36(3.435,2.75)
  rect 0.27x0.86 smd mask+0.05: 13(-2.75,-3.435) 14(-2.25,-3.435) 15(-1.75,-3.435) 16(-1.25,-3.435) 17(-0.75,-3.435) 18(-0.25,-3.435) 19(0.25,-3.435) 20(0.75,-3.435) 21(1.25,-3.435) 22(1.75,-3.435) 23(2.25,-3.435) 24(2.75,-3.435) 37(2.75,3.435) 38(2.25,3.435) 39(1.75,3.435) 40(1.25,3.435) 41(0.75,3.435) 42(0.25,3.435) 43(-0.25,3.435) 44(-0.75,3.435) 45(-1.25,3.435) 46(-1.75,3.435) 47(-2.25,3.435) 48(-2.75,3.435)
  rect 5.6x5.6 smd paste-4 mask+0.05: 49(0,0)
  silkscreen extent -4.6,-3.5 3.5,3.5, body extent -3.5,-3.5 3.5,3.5, height 0.65
RELAY_SRD-05VDC-SL-C [mm]
  rect 1.98x1.98 / inner round 0 / far side rect 1.98x1.98 hole 1.32: A1(-6.1,6)
  round 1.98 hole 1.32: A2(-6.1,-6) NC(6.1,6) NO(6.1,-6)
  round 1.935 hole 1.29: COM(-8.1,0)
  silkscreen extent -10.3,-7.75 9.55,7.75, body extent -9.6,-7.8 9.6,7.8, height 15.8
RESC1608X55X25LL10T15 [mm] "Chip Resistor, 2-Leads, Body 1.60x0.80mm, IPC High Density"
  rect 0.6x0.8 smd: 1(-0.65,0) 2(0.65,0)
  body extent -0.85,-0.45 0.85,0.45, height 0.55
RESC1608X55X25ML10T15 [mm] "Chip Resistor, 2-Leads, Body 1.60x0.80mm, IPC Low Density"
  rect 0.8x1 smd: 1(-0.75,0) 2(0.75,0)
  body extent -0.85,-0.45 0.85,0.45, height 0.55
RESC1608X55X30LL15T15#1 [mm] "Chip Resistor, 2-Leads, Body 1.60x0.80mm, IPC High Density"
  rect 0.7x0.85 smd: 1(-0.625,0) 2(0.625,0)
  body extent -0.87,-0.48 0.87,0.48, height 0.55
RESC1608X55X30LL15T15#2 [mm] "Chip Resistor, 2-Leads, Body 1.75x0.95mm, IPC High Density"
  rect 0.75x0.85 smd: 1(-0.65,0) 2(0.65,0)
  body extent -0.87,-0.48 0.87,0.48, height 0.55
RESC1608X55X30ML15T15 [mm] "Chip Resistor, 2-Leads, Body 1.60x0.80mm, IPC Low Density"
  rect 0.9x1.05 smd: 1(-0.725,0) 2(0.725,0)
  body extent -0.87,-0.48 0.87,0.48, height 0.55
RESC1608X55X30ML20T20 [mm] "Chip Resistor, 2-Leads, Body 1.60x0.80mm, IPC Low Density"
  rect 1x1.1 smd: 1(-0.7,0) 2(0.7,0)
  body extent -0.9,-0.5 0.9,0.5, height 0.55
RESC1608X55X30NL15T15 [mm] "Chip Resistor, 2-Leads, Body 1.75x0.95mm, IPC Medium Density"
  rect 0.95x0.95 smd: 1(-0.75,0) 2(0.75,0)
  body extent -0.87,-0.48 0.87,0.48, height 0.55
RESC1609X50X30ML8T20 [mm] "Chip Resistor, 2-Leads, Body 1.65x0.95mm, IPC Low Density"
  rect 0.9x1.05 smd: 1(-0.7,0) 2(0.7,0)
  body extent -0.82,-0.48 0.82,0.48, height 0.5
RESC1609X55X30LL15T15 [mm] "Chip Resistor, 2-Leads, Body 1.75x0.95mm, IPC High Density"
  rect 0.75x0.85 smd: 1(-0.65,0) 2(0.65,0)
  body extent -0.87,-0.48 0.87,0.48, height 0.55
RESC1609X55X30ML15T15 [mm] "Chip Resistor, 2-Leads, Body 1.75x0.95mm, IPC Low Density"
  rect 1.15x1.05 smd: 1(-0.85,0) 2(0.85,0)
  body extent -0.87,-0.48 0.87,0.48, height 0.55
RESC3216X70X50LL20T25 [mm] "Chip Resistor, 2-Leads, Body 3.20x1.60mm, IPC High Density"
  rect 1.1x1.7 smd: 1(-1.3,0) 2(1.3,0)
  silkscreen extent -0.35,-0.75 0.35,0.75, body extent -1.7,-0.9 1.7,0.9, height 0.7
RESC3216X70X50ML20T25 [mm] "Chip Resistor, 2-Leads, Body 3.20x1.60mm, IPC Low Density"
  rect 1.5x1.9 smd: 1(-1.5,0) 2(1.5,0)
  silkscreen extent -0.35,-0.85 0.35,0.85, body extent -1.7,-0.9 1.7,0.9, height 0.7
RESC3216X70X50NL05T20 [mm] "Chip Resistor, 2-Leads, Body 3.20x1.60mm, IPC Medium Density"
  rect 1.1x1.65 smd: 1(-1.425,0) 2(1.425,0)
  silkscreen extent -0.5,-0.72 0.5,0.72, body extent -1.63,-0.82 1.62,0.82, height 0.7
SMTC-SOT23-6_V [mm] "SOT23, 6-Leads, Body 3.15x1.7mm, Pitch 0.95mm"
  rect 1.1x0.6 smd: 1(-1.25,0.95) 2(-1.25,0) 3(-1.25,-0.95) 4(1.25,-0.95) 5(1.25,0) 6(1.25,0.95)
  silkscreen extent -1.37,-1.55 0.3,1.93, body extent -0.87,-1.55 0.87,1.55, height 1.45
SODFL5226X100N [mm]
  rect 1.44x1.48 smd: 1(-2.165,0) 2(2.165,0)
  silkscreen extent -3.68,-1.3 2.12,1.3, body extent -2.6,-1.3 2.6,1.3, height 1
SOT95P245X110-6N [mm] "SOT23, 6-Leads, Body 2.90x2.45mm, Pitch 0.95mm, IPC Medium Density"
  rect 1x0.6 smd: 1(-1.2,0.95) 2(-1.2,0) 3(-1.2,-0.95) 4(1.2,-0.95) 5(1.2,0) 6(1.2,0.95)
  silkscreen extent -1.33,-1.5 0.3,1.92, body extent -0.7,-1.5 0.7,1.5, height 1.1
W16MK+1_N [mm] "SOIC, 16-Leads, Body 10.3x7.5mm, Pitch 1.27mm, IPC Medium Density"
  oval 2.3x0.6 smd: 1(-4.55,4.445) 2(-4.55,3.175) 3(-4.55,1.905) 4(-4.55,0.635) 5(-4.55,-0.635) 6(-4.55,-1.905) 7(-4.55,-3.175) 8(-4.55,-4.445) 9(4.55,-4.445) 10(4.55,-3.175) 11(4.55,-1.905) 12(4.55,-0.635) 13(4.55,0.635) 14(4.55,1.905) 15(4.55,3.175) 16(4.55,4.445)
  silkscreen extent -4.67,-5.25 3,5.42, body extent -3.8,-5.25 3.8,5.25, height 2.65
WL-SMCW_1206_150120xx75000 [mm] "SMD Mono-color Chip LED, body 3.2x1.6mm"
  rect 1.4x1.6 smd: 1(-1.5,0) 2(1.5,0)
  silkscreen extent -2.6,-0.75 -2.4,0.75, body extent -1.6,-0.8 1.6,0.8, height 0.68
XTAL_C3E-8.000-10-1020-M [mm]
  rect 1.4x1.2 smd: 1(-1.1,-0.85) 2(1.1,-0.85) 3(1.1,0.85) 4(-1.1,0.85)
  silkscreen extent -2.4,-1.25 0.08,1.25, body extent -1.6,-1.25 1.6,1.25, height 0.75

## Part data
C1 C2: library part CMP-2000-05002-2, "CAP CER 0.1UF 16V X7R 0603", Capacitance="100 nF", Manufacturer=YAGEO, Manufacturer Part Number=CC0603KRX7R7BB104, Package=CC0603-DA, Temperature="-55°C to +125°C", Temperature Characteristic=X7R, Temperature Coefficient=15%, Temperature Range High=+125°C, Temperature Range Low=-55°C, Tolerance=0.1, Voltage="16 V", Automotive=No, Category=Cap, ComponentLink2Description=Datasheet, ComponentLink2URL=http://www.yageo.com/documents/recent/UPY-GPHC_X7R_6.3V-to-50V_18.pdf, Device Class L1="Passive Components", Device Class L2=Capacitors, Device Class L3="Ceramic Capacitors", Digikey Description="CAP CER 0.1UF 16V X7R 0603", Footprint Url=http://www.yageo.com/exep/pages/download/literatures/UPY-C_GEN_24.pdf, Height=0.9mm, Lead Free=Yes, Material=Ceramic, Mouser Description="Multilayer Ceramic Capacitor, CC Series, 0.1 - F, - 10%, X7R, 16 V, 0603 [1608 Metric]", Octopart=https://octopart.com/cc0603krx7r7bb104-yageo-192941, RoHS=TRUE, Voltage Rating="16 V"
C3 C9 C10 C11 C14 C15 C26 C28 C29 C31: library part CMP-2000-07546-2, "Cap Ceramic 100nF 50V X7R 10% Pad SMD 0603 +125°C Automotive T/R", Case Code (Imperial)=0603, Case Code (Metric)=1608, Dielectric=X7R, Max Operating Temperature=125°C, Min Operating Temperature=-55°C, Package Quantity=1, Ratings=AEC-Q200, Tolerance=10%, Voltage=50V, Capacitance=100nF, Case/Package=0603, Composition=Ceramic, Depth=0.8mm, Height=0.8mm, Lead Free="Lead Free", Length=1.6mm, Mount="Surface Mount", Packaging="Tape and Reel", Radiation Hardening=No, REACH SVHC="No SVHC", Termination=SMD/SMT, Thickness=0.035inch, Voltage Rating=50V, Voltage Rating (DC)=50V, Weight=7.1E-05oz, Width=0.8mm
C4A C4B C4C C4D C12: library part CMP-2100-03600-2, "CAP CER 10000PF 50V X7R 0603", Capacitance="10 nF", Manufacturer=YAGEO, Manufacturer Part Number=CC0603KRX7R9BB103, Package=CC0603-DA, Temperature="-55°C to +125°C", Temperature Characteristic=X7R, Temperature Coefficient=15%, Temperature Range High=+125°C, Temperature Range Low=-55°C, Tolerance=0.1, Voltage="50 V", Automotive=No, Category=Cap, ComponentLink2Description=Datasheet, ComponentLink2URL=http://www.yageo.com/documents/recent/UPY-GPHC_X7R_6.3V-to-50V_18.pdf, Device Class L1="Passive Components", Device Class L2=Capacitors, Device Class L3="Ceramic Capacitors", Digikey Description="CAP CER 10000PF 50V X7R 0603", Footprint Url=http://www.yageo.com/exep/pages/download/literatures/UPY-C_GEN_24.pdf, Height=0.9mm, Lead Free=Yes, Material=Ceramic, Mouser Description="Multilayer Ceramic Capacitor, CC Series, 0.01 - F, - 10%, X7R, 50 V, 0603 [1608 Metric]", Octopart=https://octopart.com/cc0603krx7r9bb103-yageo-192938, RoHS=TRUE, Voltage Rating="50 V"
C5 C6: library part CMP-08246-001317-1, "Cap Ceramic 6pF 50V C0G 0.5pF Pad SMD 0603 +125°C Automotive T/R", Case Code (Imperial)=0603, Case Code (Metric)=1608, Dielectric=C0G, Max Operating Temperature=125°C, Min Operating Temperature=-55°C, Package Quantity=1, Ratings=AEC-Q200, Voltage Rating=50V, Capacitance=6pF, Case/Package=0603, Composition=Ceramic, Depth=0.8mm, Height=0.8mm, Length=1.6mm, Mount="Surface Mount", Packaging="Tape and Reel", REACH SVHC="No SVHC", Termination=SMD/SMT, Thickness=0.035inch, Voltage Rating (DC)=50V, Weight=7.1E-05oz, Width=0.031inch
C7 C8: library part CMP-2006-03343-2, "CAP CER 10PF 50V NP0 0603", Capacitance="10 pF", Manufacturer=KEMET, Manufacturer Part Number=C0603C100C5GACTU, Package=C0603C-CF, Temperature="-55°C to +125°C", Temperature Characteristic=C0G, Temperature Coefficient=30ppm/°C, Temperature Range High=+125°C, Temperature Range Low=-55°C, Tolerance="0.25 pF", Voltage Rating="50 V", Automotive=Yes, Automotive Grade="Grade 1", Category=Cap, ComponentLink2Description=Datasheet, ComponentLink2URL=https://api.kemet.com/component-edge/download/datasheet/C0603C100J5GACAUTO.pdf, Device Class L1="Passive Components", Device Class L2=Capacitors, Device Class L3="Ceramic Capacitors", Digikey Description="CAP CER 10PF 50V NP0 0603", Height=0.87mm, Lead Free=Yes, Material=Ceramic, Mouser Description="Multilayer Ceramic Capacitors MLCC - SMD/SMT 50volts 10pF C0G 0.25%", Octopart=https://octopart.com/c0603c100c5gactu-kemet-9138556, RoHS=TRUE
C13: library part CMP-2000-06025-2, "Multilayer Ceramic Capacitors 1μF ±10% 50V X5R SMD 0603", Case Code (Imperial)=0603, Case Code (Metric)=1608, Dielectric=X5R, Dielectric Material=Ceramic, Max Operating Temperature=85°C, Min Operating Temperature=-55°C, Package Quantity=1, Tolerance=10%, Voltage=50V, Capacitance=1uF, Case/Package=0603, Construction=Flat, Depth=0.8mm, Height=0.8mm, Lead Free="Lead Free", Length=1.6mm, Mount="Surface Mount", Number of Pins=2, Packaging="Tape and Reel", Radiation Hardening=No, REACH SVHC="No SVHC", Resistor Type=Ceramic, RoHS Compliant=Yes, Series=C, Termination=SMD/SMT, Thickness=0.035inch, Voltage Rating=50V, Voltage Rating (DC)=50V, Weight=7.1E-05oz, Width=0.031inch
C16: library part CMP-2006-02836-2, "Chip Multilayer Ceramic Capacitors for General Purpose, 0603, 2.2uF, X7R, 15%, 10%, 10V", Case Code (Imperial)=0603, Case Code (Metric)=1608, Dielectric=X7R, Max Operating Temperature=125°C, Min Operating Temperature=-55°C, Package Quantity=1, Tolerance=10%, Voltage=10V, Capacitance=2.2uF, Case/Package=0603, Depth=0.8mm, Height=0.8mm, Lead Free="Lead Free", Length=1.6mm, Material=Ceramic, Mount="Surface Mount", Number of Pins=2, Packaging="Cut Tape", REACH SVHC="No SVHC", Termination=SMD/SMT, Thickness=0.035inch, Voltage Rating=10V, Voltage Rating (DC)=10V, Weight=7.1E-05oz, Width=0.031inch
C17 C25: library part CMP-2000-06045-2, "Multilayer Ceramic Capacitors 10uF ±10% 50V X5R SMD 1206", Case Code (Imperial)=1206, Case Code (Metric)=3216, Dielectric=X5R, Dielectric Material=Ceramic, Max Operating Temperature=85°C, Min Operating Temperature=-55°C, Package Quantity=1, Tolerance=10%, Voltage=50V, Capacitance=10uF, Case/Package=1206, Construction=Flat, Depth=1.6mm, Height=1.6mm, Lead Free="Lead Free", Length=3.2mm, Mount="Surface Mount", Packaging="Tape and Reel", Radiation Hardening=No, REACH SVHC="No SVHC", Resistor Type=Ceramic, RoHS Compliant=Yes, Series=C, Termination=SMD/SMT, Thickness=0.071inch, Voltage Rating=50V, Voltage Rating (DC)=50V, Weight=0.000571oz, Width=0.063inch
C18 C23: library part CMP-2000-06211-2, "CAP ALUM 10UF 20% 35V SMD", Case/Package=Radial, ESR (Equivalent Series Resistance)=1.35R, Leakage Current=3uA, Max Operating Temperature=105°C, Min Operating Temperature=-55°C, Package Quantity=1, Ripple Current=90mA, Tolerance=20%, Voltage=35V, Capacitance=10uF, Construction=Cylindrical, Contact Plating=Tin, Diameter=4mm, Height=5.8mm, Height - Seated (Max)=0.24inch, Impedance=1.35R, Lead Free="Lead Free", Length=5.8mm, Life (Hours)=2000Hour, Material=Aluminium, Mount="Surface Mount", Number of Pins=2, Packaging="Tape and Reel", Polarity=Polar, Radiation Hardening=No, REACH SVHC="No SVHC", Ripple Current (AC)=90mA, RoHS Compliant=Yes, Series=FK, Termination=SMD/SMT, Voltage Rating=35V, Voltage Rating (DC)=35V, Width=5.5mm